# Altium PCB JacdacBrainNRF 57.PcbDoc (part 2 of 2)
Units mm, origin at the board's own origin, x right, y up, seen from the top; angles counter-clockwise.
Board outline 33.2 x 27.66 mm, 2 copper layers (Top Layer, Bottom Layer), stack 1.525 mm thick; 62 components, 38 nets, 255 pads, 60 vias.
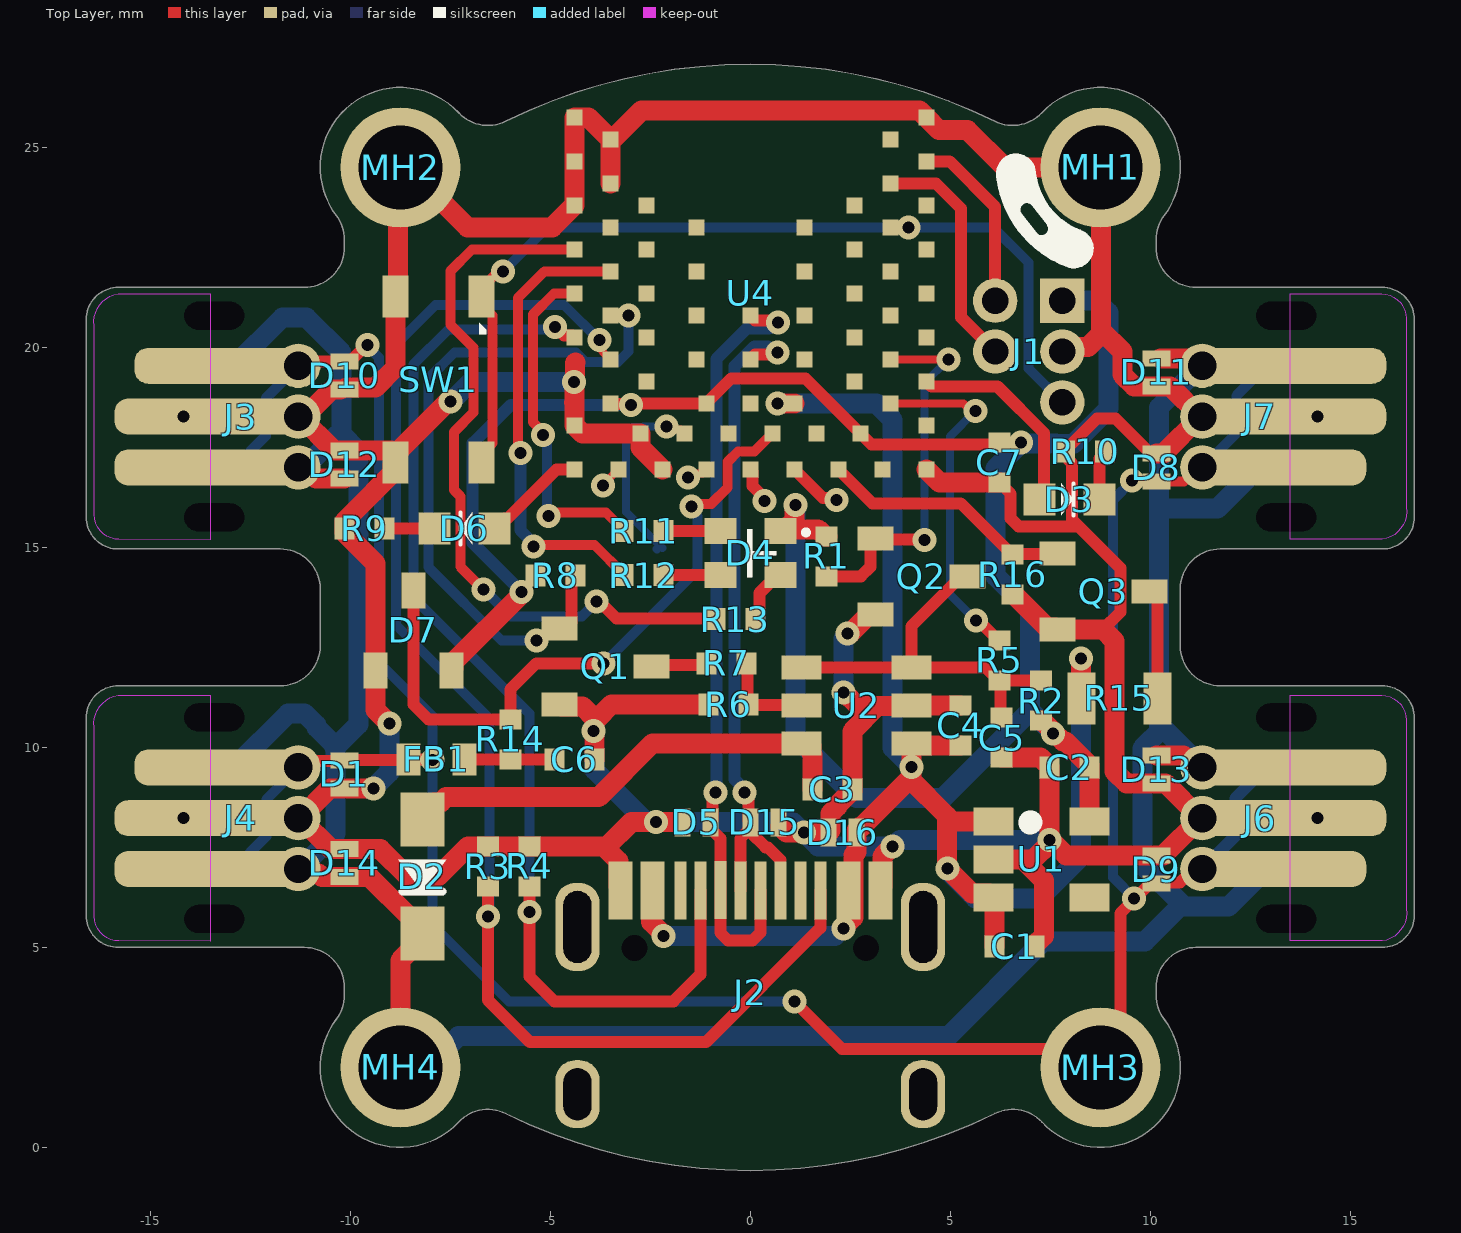
[diagram p0: Top Layer view]

## Via types
v1: diameter 0.6, hole 0.3, Top Layer to Bottom Layer, tented both sides, 60 vias

## Nets (pads, with @x,y where several pads share a name; then routed paths per layer and width w, separated by ;. In a path a pad name is that pad's centre, name@x,y a point inside that pad or via, vN(x,y) a via of type N, cw(c..) or ccw(c..) an arc to the next point about the centre after c; other vN are vias at no path point) (continued)
\I\L\I\M\_\E\N\A\B\L\E\: (continued)
  Top Layer w0.2: U4.34 v1(4.95,19.7) v1@4.975,19.725
  Top Layer w0.3: R1.2@2.075,14.275 2.765,14.275 3.005,14.515 3.005,15.105 3.148,15.248 3.193,15.203 4.329,15.203 v1(4.351,15.181)
  Bottom Layer w0.2: v1(4.351,15.181) 4.351,19.101 v1(4.95,19.7)
\I\L\I\M\_\F\A\U\L\T\: R5.1 U4.32 | length 8.8
  Top Layer w0.2: U4.32@3.504,18.596 5.329,18.596 5.518,18.407 v1(5.626,18.407)
  Top Layer w0.3: v1(5.645,13.174) 5.701,13.174 6.2,12.675 R5.1
  Bottom Layer w0.2: v1(5.626,18.407) 4.994,17.775 4.994,13.826 v1(5.645,13.174)
BL_STATUS: D6.2 U4.16 | length 2.6
  Top Layer w0.3: D6.2 -6.15,15.725 -6.064,15.725 -4.839,16.95 U4.16
CC1: J2.A5 R4.1 U4.11 | length 28.6
  Top Layer w0.3: R4.1 v1(-5.525,5.891) -5.525,4.275 -4.9,3.65 -1.925,3.65 -1.25,4.325 J2.A5 ; v1(-4.888,20.513) -4.872,20.513 -4.658,20.3 -4.45,20.3 U4.11
  Bottom Layer w0.25: v1(-5.525,5.891) -5.525,10.844 -8.425,13.744 -8.425,19.572 -7.547,20.45 -4.952,20.45 v1(-4.888,20.513)
CC2: J2.B5 R3.1 U4.12 | length 35.4
  Top Layer w0.2: v1(-3.775,20.182) -3.698,20.105 -3.698,19.898 U4.12
  Top Layer w0.3: R3.1 v1(-6.56,5.777) -6.56,3.685 -5.509,2.634 -1.105,2.634 1.75,5.49 J2.B5
  Bottom Layer w0.25: v1(-6.56,5.777) -6.52,5.817 -6.52,10.726 -8.857,13.062 -8.857,20.074 -7.867,21.063 -4.657,21.063 v1(-3.775,20.182)
GND: C1.1 C2.1 C3.1 C4.1 C5.1 C6.1 C7.1 D1.2 D5.2 D7.1 D8.2 D9.2 D10.2 D11.2 D12.2 D13.2 D14.2 D15.2 D16.2 J1.3 J2.A1 J2.A12 J2.B1 J2.B12 J3.2 J4.2 J6.2 J7.2 MH1.1 MH2.1 Q1.2 Q2.2 Q3.2 R3.2 R4.2 R6.1 R9.2 R10.2 R16.1 SW1.3 SW1.4 U1.2 U2.2 U4.1 U4.2 U4.3 U4.4 U4.5 U4.13 U4.15 U4.18 U4.19 U4.30 U4.45 | length 140.3
  Top Layer w0.3: C7.1 6.25,16.625 6.35,16.525 6.35,16.5 6.511,16.339 6.511,15.723 6.711,15.522 8.211,15.522 ; C2.1 C2.1@7.475,9.525 ; 8.818,12.95 9.25,13.382 9.25,14.483 8.211,15.522 ; D8.2 10,17.35 9.133,18.217 8.666,18.217 7.874,17.424 7.874,17.374 7.974,17.274 7.974,17.171 8.046,17.098 8.046,15.688 8.211,15.522
  Top Layer w0.5: J4.2@-11.3,8.23 J4.2@-11.255,8.23 ; J3.2@-11.3,18.27 J3.2@-11.255,18.27 ; D10.2@-10.25,18.95 -10.455,18.95 -11.135,18.27 J3.2@-11.255,18.27 ; D10.2@-10.1,19 -9.365,19 -8.87,19.495 SW1.3@-8.87,21.27 ; v1(-9.425,8.975) D1.2 -10.51,8.975 J4.2@-11.255,8.23 ; D7.1 -9.375,10.939 -9.036,10.6 v1(-9.025,10.6) ; D7.1@-9.367,11.933 -9.367,14.593 -10.15,15.376 -10.15,15.645 -9.425,16.37 -9.425,16.375 -8.95,16.85 -8.95,17.05 SW1.4 SW1.4@-8.875,17.325 ; SW1.3 -8.812,21.337 -8.812,24.437 MH2.1 -8.568,24.5 -7.068,23 -4.95,23 U4.5 U4.3 U4.1 -4.05,25.75 U4.2 ; v1(-7.5,18.645) -7.519,18.626 -7.574,18.626 SW1.4@-8.875,17.325 ; Q1.2 -4.725,11.025 -4.193,11.025 -3.9,10.732 ; v1(-4.41,19.14) U4.13@-4.4,19.14 ; -4.364,19.625 -4.384,19.606 -4.384,19.189 -4.4,19.173 U4.13 U4.13@-4.4,19.14 ; C6.1 -3.9,10.39 v1(-3.915,10.405) -3.9,10.42 -3.9,10.732 ; -3.61,7.495 -2.966,8.139 v1(-2.358,8.139) D5.2@-1.75,8.139 ; U4.4 U4.2 ; J2.A1@-3.3,6.525 -3.3,7.16 -3.665,7.525 R4.2 R3.2 -7.051,7.525 -7.801,6.775 -8.568,6.775 -9.247,7.454 D14.2 -10.479,7.454 J4.2@-11.255,8.23 ; J2.A1@-3.273,6.25 J2.A1@-3.273,6.298 ; U4.19 -2.75,17.5 U4.18 -4.2,17.85 U4.15 -4.4,18.617 -4.41,18.626 -4.4,18.636 U4.13@-4.4,19.14 ; R6.1 -3.469,11.075 -3.811,10.732 -3.9,10.732 ; D15.2@0.75,8.025 0.9,7.875 v1(1.347,7.875) D16.2@1.795,7.875 ; D16.2 2,7.925 2,8.345 2.175,8.52 2.175,8.55 2.55,8.925 C3.1 2.55,10.4 3.182,11.032 ; v1(2.325,11.374) 2.352,11.374 2.694,11.032 3.182,11.032 ; v1(2.425,12.85) 2.5,12.85 2.975,13.325 Q2.2 ; J2.A12@3.3,6.525 3.3,7.275 v1(3.55,7.525) ; U4.30 4.725,16.625 C7.1 ; C4.1 5.225,11.05 U2.2 4.007,11.032 3.182,11.032 ; U1.2 6.807,7.2 ; C5.1 7.259,9.741 C2.1@7.475,9.525 ; R16.1 6.584,13.826 7.41,13 7.625,13 Q3.2 8.818,12.95 9.111,12.657 9.111,9.393 9.404,9.1 D13.2 10.385,9.1 J6.2@11.255,8.23 ; C1.1 7.1,5.05 7.341,5.291 7.341,6.666 6.807,7.2 ; C2.1 v1(7.475,7.69) ; J1.3 7.917,20.013 8.448,20.013 8.762,20.327 ; MH1.1 6.361,24.5 5.425,25.436 4.714,25.436 U4.45 4.225,25.925 -2.715,25.925 -3.44,25.2 U4.2 ; MH1.1@8.762,24.488 8.762,20.327 ; D8.2 10.335,17.35 J7.2@11.255,18.27 ; J6.2@11.3,8.23 J6.2@11.255,8.23 ; J7.2@11.3,18.27 J7.2@11.255,18.27 ; J3.2@-11.255,18.27 -10.41,17.425 D12.2 -8.975,17.425 SW1.4@-8.875,17.325 ; 6.807,7.2 7.082,7.2 7.475,7.593 v1(7.475,7.69) ; v1(7.475,7.69) 7.502,7.69 7.892,7.3 D9.2 10.325,7.3 J6.2@11.255,8.23 ; 8.762,20.327 8.768,20.333 8.768,20.432 9.3,19.9 9.3,19.318 9.593,19.025 D11.2 10.5,19.025 J7.2@11.255,18.27
  Bottom Layer w0.5: v1(-9.425,8.975) -9.025,9.375 v1@-9.025,10.573 ; v1(-7.5,18.645) -7.473,18.645 -6.978,19.14 v1(-4.41,19.14) ; v1(-3.915,10.405) -3.896,10.386 -3.896,9.436 -2.618,8.158 -2.377,8.158 v1(-2.358,8.139) 1.057,8.139 1.32,7.875 v1(1.347,7.875) 1.697,7.525 v1@3.523,7.525 ; v1@2.325,11.401 2.325,12.723 2.425,12.823 v1(2.425,12.85) ; v1(3.55,7.525) 3.577,7.525 3.742,7.69 v1@7.448,7.69
  other v1: -14.175,8.23 14.175,8.23 -14.175,18.27 14.175,18.27
ILIM_STATUS: D3.2 U4.33 | length 5.2
  Top Layer w0.3: U4.33 4.527,19.023 6.182,19.023 7.349,17.856 7.349,16.321 D3.2
JD_DATA: D1.1 D8.1 D9.1 D10.1 FB1.1 J3.1 J4.1 J6.1 J7.1 MH3.1 | length 75
  Top Layer w0.25: v1(9.543,16.673) 9.555,16.662 10.138,16.662 D8.1 10.839,16.65 11.189,17 J7.1@11.3,17
  Top Layer w0.3: J4.1@-11.3,9.5 -11.145,9.655 -10.17,9.655 D1.1 -10.137,9.688 -8.563,9.688 FB1.1 -8.544,9.694 -7.949,9.694 v1(-7.943,9.689) ; J3.1@-11.3,19.54 -11.19,19.65 D10.1 -10,19.65 -9.585,20.065 v1(-9.571,20.065) ; v1(1.1,3.65) 2.295,2.455 8.295,2.455 MH3.1 9.25,2.5 9.25,5.85 10,6.6 D9.1 10.333,6.6 10.35,6.617 10.738,6.617 11.081,6.96 J6.1@11.3,6.96
  Bottom Layer w0.25: J4.1@-13.925,6.96 -12.918,6.96 -12.1,7.778 -12.1,8.7 J4.1@-11.3,9.5 ; J3.1@-13.925,17 -12.9,17 -12.111,17.789 -12.111,18.729 J3.1@-11.3,19.54 ; v1(-9.571,20.065) -9.571,20.032 -9.283,19.743 -9.283,12.125 -7.943,10.785 v1(-7.943,9.689) -7.943,5.559 -6.034,3.65 v1(1.1,3.65) ; v1(9.543,16.673) 9.543,16.662 9.072,16.19 9.072,6.751 v1(9.598,6.225) ; J7.1@11.3,17 12.15,17.85 12.15,18.79 12.9,19.54 J7.1@13.925,19.54
  Bottom Layer w0.3: J6.1@11.3,6.96 12.125,7.785 12.125,8.725 12.9,9.5 J6.1@13.925,9.5
JD_DATA_MCU: D7.3 R14.1 U4.24 | length 17
  Top Layer w0.25: v1@-1.514,16.064 v1(-1.473,16.023) ; v1@-1.474,16.03 -1.414,16.089 -0.975,16.089 -0.564,16.5 -0.564,17.14 -0.304,17.4 -0.246,17.4 0.1,17.4 U4.24
  Top Layer w0.3: D7.3@-8.406,13.944 D7.3 -8.425,11.075 -8.05,10.7 R14.1 -6,11.45 -5.35,12.1 v1(-3.665,12.1) ; U4.24 U4.24@0.553,17.852
  Bottom Layer w0.25: v1(-3.665,12.1) -1.315,14.45 -1.315,15.77 -1.473,15.928 v1(-1.473,16.023)
JD_PWR: D2.1 D11.1 D12.1 D13.1 D14.1 J3.3 J4.3 J6.3 J7.3 MH4.1 | length 81.3
  Top Layer w0.5: J4.3@-11.3,6.96 -11.183,6.843 -10.791,6.843 -10.702,6.754 D14.1 -9.51,6.754 -8.531,5.775 -8.5,5.775 -8.2,5.475 -8.2,5.225 -8.75,4.675 MH4.1 ; J3.3@-11.3,17 -11.135,17 -10.86,16.725 D12.1 ; D13.1 10.835,9.8 11.135,9.5 J6.3@11.3,9.5 ; D11.1@10.25,19.725 10.95,19.725 11.135,19.54 J7.3@11.3,19.54
  Bottom Layer w0.5: J4.3@-14.175,9.5 -12.9,9.5 -11.553,10.847 -11.139,10.847 -10.846,10.554 -10.846,10.5 -10.391,10.045 -10.391,9.983 ; J3.3@-14.175,19.54 -12.9,19.54 -11.692,20.748 -11.1,20.748 -10.216,19.864 -10.216,17.826 ; J4.3@-11.3,6.96 -11.262,6.96 -10.375,7.847 -10.375,9.967 -10.391,9.983 ; J3.3@-11.3,17 -11.138,17 -10.312,17.826 -10.216,17.826 ; MH4.1 -8.074,2 -7.294,2.779 4.954,2.779 7.326,5.151 9.868,5.151 10.792,6.076 ; 10.218,10.393 10.218,15.977 ; J6.3@11.3,9.5 10.299,10.501 10.299,10.474 9.8,9.975 9.8,7.068 10.848,6.02 11.96,6.02 12.9,6.96 J6.3@14.175,6.96 ; J7.3@11.3,19.54 11.262,19.54 10.218,18.496 10.218,15.977 ; J7.3@14.175,17 14.037,16.862 12.571,16.862 11.685,15.977 10.218,15.977 ; -10.391,9.983 -9.8,10.574 -9.8,17.41 -10.216,17.826
JD_RGB_B: R11.2 U4.9 | length 8.6
  Top Layer w0.25: v1(-5.177,17.813) -5.177,17.873 -5.438,18.134 -5.438,20.816 -4.904,21.35 U4.9 ; v1(-5.041,15.787) -4.96,15.787 -4.873,15.873 -3.607,15.873 -3.163,15.43 R11.2
  Bottom Layer w0.25: v1(-5.177,17.813) -5.177,17.718 -5.085,17.626 -5.085,15.831 v1(-5.041,15.787)
JD_RGB_G: R12.2 U4.8 | length 11.6
  Top Layer w0.25: v1(-5.746,17.364) -5.813,17.431 -5.813,21.236 -5.149,21.9 U4.8 ; v1(-5.425,15.026) -5.391,15.061 -3.894,15.061 -3.163,14.33 R12.2
  Bottom Layer w0.3: v1(-5.746,17.364) -5.746,15.429 -5.425,15.107 v1(-5.425,15.026)
JD_RGB_R: R13.2 U4.7 | length 18.4
  Top Layer w0.25: v1(-6.675,13.944) -7.25,14.519 -7.25,16.278 -7.402,16.431 -7.402,17.891 -6.923,18.369 -6.923,19.996 -7.5,20.573 -7.5,21.905 -6.956,22.45 U4.7
  Top Layer w0.3: v1(-3.844,13.642) -3.762,13.642 -3.349,13.228 -0.892,13.228 R13.2
  Bottom Layer w0.25: v1(-6.675,13.944) -6.651,13.944 -5.986,13.278 -4.207,13.278 v1(-3.844,13.642)
NetC3_2: C3.2 D2.2 U2.6 | length 11.7
  Top Layer w0.5: D2.2 -8.2,8.325 -7.9,8.625 -7.736,8.625 -7.607,8.754 -3.791,8.754 -2.445,10.1 1.475,10.1 1.525,10.05 1.525,9.85 1.55,9.825 C3.2
NetC5_2: C5.2 Q2.3 R2.2 R5.2 U2.3 U2.4 | length 10
  Top Layer w0.3: U2.4 U2.3 ; Q2.3 5.275,14.275 4.025,13.025 U2.3 ; C5.2 6.254,10.771 6.254,11.621 R5.2@6.2,11.675 ; R2.2 7.265,11.675 R5.2 R5.2@6.2,11.675 ; U2.3 5.875,12 R5.2@6.2,11.675
NetC6_2: C6.2 FB1.2 R14.2 | length 2.3
  Top Layer w0.3: FB1.2 R14.2 C6.2
NetD3_1: D3.1 R10.1 | length 1.3
  Top Layer w0.3: D3.1 8.725,17.225 8.874,17.374 R10.1
NetD4_2: D4.2 R13.1 | length 1.4
  Top Layer w0.3: R13.1 0.23,13.306 0.23,13.86 0.675,14.305 D4.2
NetD4_3: D4.3 R12.1 | length 1.4
  Top Layer w0.3: R12.1 D4.3
NetD4_4: D4.4 R11.1 | length 1.4
  Top Layer w0.3: R11.1 D4.4
NetD6_1: D6.1 R9.1 | length 1.3
  Top Layer w0.3: R9.1 D6.1
NetQ1_3: Q1.3 R7.1 | length 1.4
  Top Layer w0.3: Q1.3 -2.437,12.063 -1.137,12.063 R7.1
NetQ3_3: Q3.3 R15.1 | length 2.8
  Top Layer w0.3: Q3.3 10.025,13.9 10.175,13.75 R15.1
NetR6_2: R6.2 R7.2 U2.5 | length 2.4
  Top Layer w0.3: R7.2 -0.075,12.075 -0.075,11.1 R6.2 -0.038,11.063 1.263,11.063 U2.5
NetTP2_1: TP2.1 U4.17 | length 0.6
  Top Layer w0.2: v1(-3.685,16.553) -3.685,16.565 U4.17
NetTP3_1: TP3.1 U4.20 | length 4.9
  Top Layer w0.2: v1(-2.098,18.025) -2.022,17.948 -1.748,17.948 U4.20
  Bottom Layer w0.2: TP3.1@-2.341,14.965 TP3.1@-2.326,14.951 ; TP3.1 -3.11,15.89 -3.11,17.85 -2.947,18.013 -2.687,18.013 -2.675,18.025 v1(-2.098,18.025)
NetTP4_1: TP4.1 U4.21 | length 0.5
  Top Layer w0.2: v1(-1.558,16.743) -1.449,16.743 -1.342,16.85 -1.2,16.85 U4.21
NetTP5_1: TP5.1 U4.23 | length 0.9
  Top Layer w0.3: U4.23 0.05,16.9 0.05,16.54 0.353,16.236 v1(0.353,16.155)
NetTP6_1: TP6.1 U4.25 | length 1.4
  Top Layer w0.3: U4.25 1.813,16.237 2.1,16.237 v1(2.157,16.18)
RESET: J1.5 SW1.1 SW1.2 U4.40 | length 23.2
  Top Layer w0.25: SW1.2 -6.725,17.325 -6.444,17.606 -6.444,20.794 -6.725,21.075 SW1.1 ; SW1.1@-6.725,21.475 -6.382,21.818 -6.358,21.818 -6.276,21.9 v1(-6.181,21.9)
  Top Layer w0.3: U4.40 v1(3.959,23)
  Bottom Layer w0.25: v1(-6.181,21.9) -5.081,23 v1(3.959,23) ; v1@4.075,23 6.074,23 6.954,22.12 6.954,19.473 J1.5
SWCLK: J1.4 U4.42 | length 5.9
  Top Layer w0.3: U4.42@3.508,24.092 4.647,24.092 5.272,23.467 5.272,20.748 J1.4
SWDIO: J1.2 U4.43 | length 4.5
  Top Layer w0.3: U4.43 4.983,24.65 6.124,23.51 J1.2
USB_D_N: D5.1 J2.A7 J2.B7 U4.68 | length 19.4
  Top Layer w0.3: v1(-0.875,8.875) -0.875,8.794 -0.95,8.719 -0.95,8.175 D5.1 -1,7.975 -0.75,7.725 J2.B7 -0.75,5.369 -0.551,5.17 0.051,5.17 0.25,5.369 J2.A7 ; U4.68 0.121,20.679 0.636,20.679 v1(0.693,20.621)
  Bottom Layer w0.3: v1(-0.875,8.875) -0.844,8.906 -0.844,19.715 -0.086,20.473 0.464,20.473 0.612,20.621 v1(0.693,20.621)
USB_D_P: D15.1 J2.A6 J2.B6 U4.67 | length 16.6
  Top Layer w0.3: J2.A6 -0.25,7.725 D15.1@0,7.975 ; v1(-0.15,8.875) -0.15,8.794 -0.05,8.694 -0.05,8.175 D15.1 D15.1@0,7.975 ; U4.67 0.118,19.818 0.618,19.818 v1(0.675,19.875) ; 0.75,7.187 0.675,7.262 0.675,7.264 0.439,7.5 0.386,7.5 0,7.886 D15.1@0,7.975
  Bottom Layer w0.3: v1(-0.15,8.875) -0.15,8.956 -0.394,9.2 -0.394,19.529 0.1,20.023 0.446,20.023 0.594,19.875 v1(0.675,19.875)
VUSB: C1.2 C4.2 D16.1 J2.A4 J2.A9 J2.B4 J2.B9 R15.2 U1.1 U1.3 U2.1 U4.58 | length 41
  Top Layer w0.5: J2.A4@-2.483,6.242 -2.483,5.634 -2.182,5.333 v1@-2.196,5.32 ; v1(0.675,18.6) U4.58 ; v1(2.325,5.473) 2.325,5.5 2.575,5.75 2.575,7.305 2.65,7.38 D16.1 2.65,7.925 2.75,8.025 2.8,8.025 3.988,9.213 ; C4.2 4.075,10.05 U2.1 4.025,9.25 3.988,9.213 ; U1.1 4.917,8.15 ; C1.2 6.1,6.225 U1.3 5.975,6.35 5.545,6.35 4.917,6.978 4.917,8.15 ; v1(8.271,12.221) 8.273,12.219 8.273,11.227 R15.2 ; 3.988,9.213 4.917,8.284 4.917,8.15
  Bottom Layer w0.5: v1(-2.163,5.287) 2.112,5.287 2.298,5.473 v1(2.325,5.473) ; v1(0.675,18.6) 3.15,18.6 3.56,18.19 3.56,9.983 v1(4.032,9.511) ; v1@4.953,6.9 5.628,6.225 7.225,6.225 8.271,7.271 v1(8.271,12.221)
  other v1: 4.924,6.97
VUSB_PULSE: Q3.1 R16.2 U4.27 | length 6.4
  Top Layer w0.3: U4.27 3.05,16.1 5.26,16.1 6.534,14.826 R16.2 6.571,14.838 7.663,14.838 Q3.1
pads on no net: J2.1 J2.2 J2.3 J2.4 J2.A8 J2.B8 J3. J4. J6. J7. U1.4 U4.6 U4.22 U4.26 U4.29 U4.31 U4.35 U4.36 U4.37 U4.38 U4.39 U4.41 U4.44 U4.46 U4.47 U4.48 U4.49 U4.50 U4.51 U4.52 U4.53 U4.54 U4.55 U4.57 U4.59 U4.60 U4.61 U4.62 U4.63 U4.64 U4.65 U4.66

## Silkscreen, mask and mechanical layers (free items; w line width, h text height)
Top Overlay:
  region: 187 vertices and 1 holes, not listed, extent 6.15,21.98 8.582,24.843
Bottom Overlay:
  drawing of 6 lines, arcs and shapes, not listed
  text "P1" at -3.7,17.95 h0.7
  text "P4" at -1.625,17.95 h0.7
  text "P5" at 0.7,17.95 h0.7
  text "P6" at 2.95,17.95 h0.7
  text "P3" at -1.625,13.05 h0.7
  text "'.ProjectCodeName'" at 7.975,9.025 h1.52
  text "'.ProjectCodenameID'-'.ProjectRevision'" at 4.95,7.025 h1.52
Dimension:
  the board outline again, w0.05
Board Outline:
  the board outline again, w0.2
Top Assy:
  the board outline again, w0.05
Bottom Assy:
  lines w0.05: -16.601,5.8 ccw(c-15.802,5.799) -15.8,5 -11.75,5 -11.146,4.999 cw(c-11.147,3.999) -10.147,3.998 -10.147,3.803 cw(c-11.147,3.805) -10.349,3.203 ccw(c-8.751,2) -7.29,0.634 cw(c-6.56,-0.049) -6.118,0.848 ccw(c0,13.25) 6.117,0.848 cw(c6.559,-0.049) 7.289,0.634 ccw(c8.75,2) 10.348,3.203 cw(c11.146,3.805) 10.146,3.803 10.146,3.998 cw(c11.146,3.999) 11.145,4.999 11.749,5 15.799,5 ccw(c15.801,5.799) 16.6,5.8 16.6,10.74 ccw(c15.801,10.741) 15.799,11.54 11.749,11.54 cw(c11.749,12.54) 10.749,12.54 10.749,13.96 cw(c11.749,13.96) 11.749,14.96 15.799,14.96 ccw(c15.801,15.759) 16.6,15.76 16.6,20.7 ccw(c15.801,20.701) 15.799,21.5 11.749,21.5 11.145,21.501 cw(c11.146,22.501) 10.146,22.502 10.146,22.697 cw(c11.146,22.695) 10.348,23.297 ccw(c8.75,24.5) 7.289,25.866 cw(c6.559,26.549) 6.117,25.652 ccw(c0,13.25) -6.118,25.652 cw(c-6.56,26.549) -7.29,25.866 ccw(c-8.751,24.5) -10.349,23.297 cw(c-11.147,22.695) -10.147,22.697 -10.147,22.502 cw(c-11.147,22.501) -11.146,21.501 -11.75,21.5 -15.8,21.5 ccw(c-15.802,20.701) -16.601,20.7 -16.601,15.76 ccw(c-15.802,15.759) -15.8,14.96 -11.75,14.96 cw(c-11.75,13.96) -10.75,13.96 -10.75,12.54 cw(c-11.75,12.54) -11.75,11.54 -15.8,11.54 ccw(c-15.802,10.741) -16.601,10.74 -16.601,5.8 ; -0.15,16.511 -0.149,16.511

## Dimensions
0,-0.579 to 0,27.079 on Dimension
-16.601,5.8 to 16.6,5.8 on Dimension
-8.75,2 to -8.75,24.5 on Dimension
-8.75,2 to 8.75,2 on Dimension

## Text inside footprints (layer, text, board x,y; h text height)
J3: Alignment "board outline  / for 'outie'" at -11.614,23.41 h1.2 r90; Alignment "board outline  / for 'innie'" at -8.769,22.8 h1.2 r90; Mechanical 9 "Jacdac / cable connector  / body" at -20.758,13.449 h1.7 r90
J4: Alignment "board outline  / for 'innie'" at -8.769,12.76 h1.2 r90; Alignment "board outline  / for 'outie'" at -11.614,13.37 h1.2 r90; Mechanical 9 "Jacdac / cable connector  / body" at -20.758,3.409 h1.7 r90
J6: Alignment "board outline  / for 'innie'" at 8.769,3.7 h1.2 r270; Alignment "board outline  / for 'outie'" at 11.614,3.09 h1.2 r270; Mechanical 9 "Jacdac / cable connector  / body" at 20.758,13.051 h1.7 r270
J7: Alignment "board outline  / for 'outie'" at 11.614,13.13 h1.2 r270; Alignment "board outline  / for 'innie'" at 8.769,13.74 h1.2 r270; Mechanical 9 "Jacdac / cable connector  / body" at 20.758,23.091 h1.7 r270
MH1: Assembly Notes "5mm dia keepout  / for traces and  / components to  / allow space for  / bushes/standoffs/ / nuts/screw heads" at 11.544,25.389 h0.5; Assembly Notes "board outline can  / be on 2.0mm   / radius if necessary" at 11.544,20.944 h0.5
MH2: Assembly Notes "board outline can  / be on 2.0mm   / radius if necessary" at -11.544,28.056 h0.5 r180; Assembly Notes "5mm dia keepout  / for traces and  / components to  / allow space for  / bushes/standoffs/ / nuts/screw heads" at -11.544,23.611 h0.5 r180
MH3: Assembly Notes "board outline can  / be on 2.0mm   / radius if necessary" at 5.194,-0.794 h0.5 r270; Assembly Notes "5mm dia keepout  / for traces and  / components to  / allow space for  / bushes/standoffs/ / nuts/screw heads" at 9.639,-0.794 h0.5 r270
MH4: Assembly Notes "5mm dia keepout  / for traces and  / components to  / allow space for  / bushes/standoffs/ / nuts/screw heads" at -7.861,-0.794 h0.5 r270; Assembly Notes "board outline can  / be on 2.0mm   / radius if necessary" at -12.306,-0.794 h0.5 r270